# Altium PCB 按键.PcbDoc
Units mm, origin at the board's own origin, x right, y up, seen from the top; angles counter-clockwise.
Board outline 152.4 x 101.6 mm, 2 copper layers (Top Layer, Bottom Layer); 8 components, 5 nets, 18 pads, 18 vias.
Unrouted connection lines stored in the file: 4.
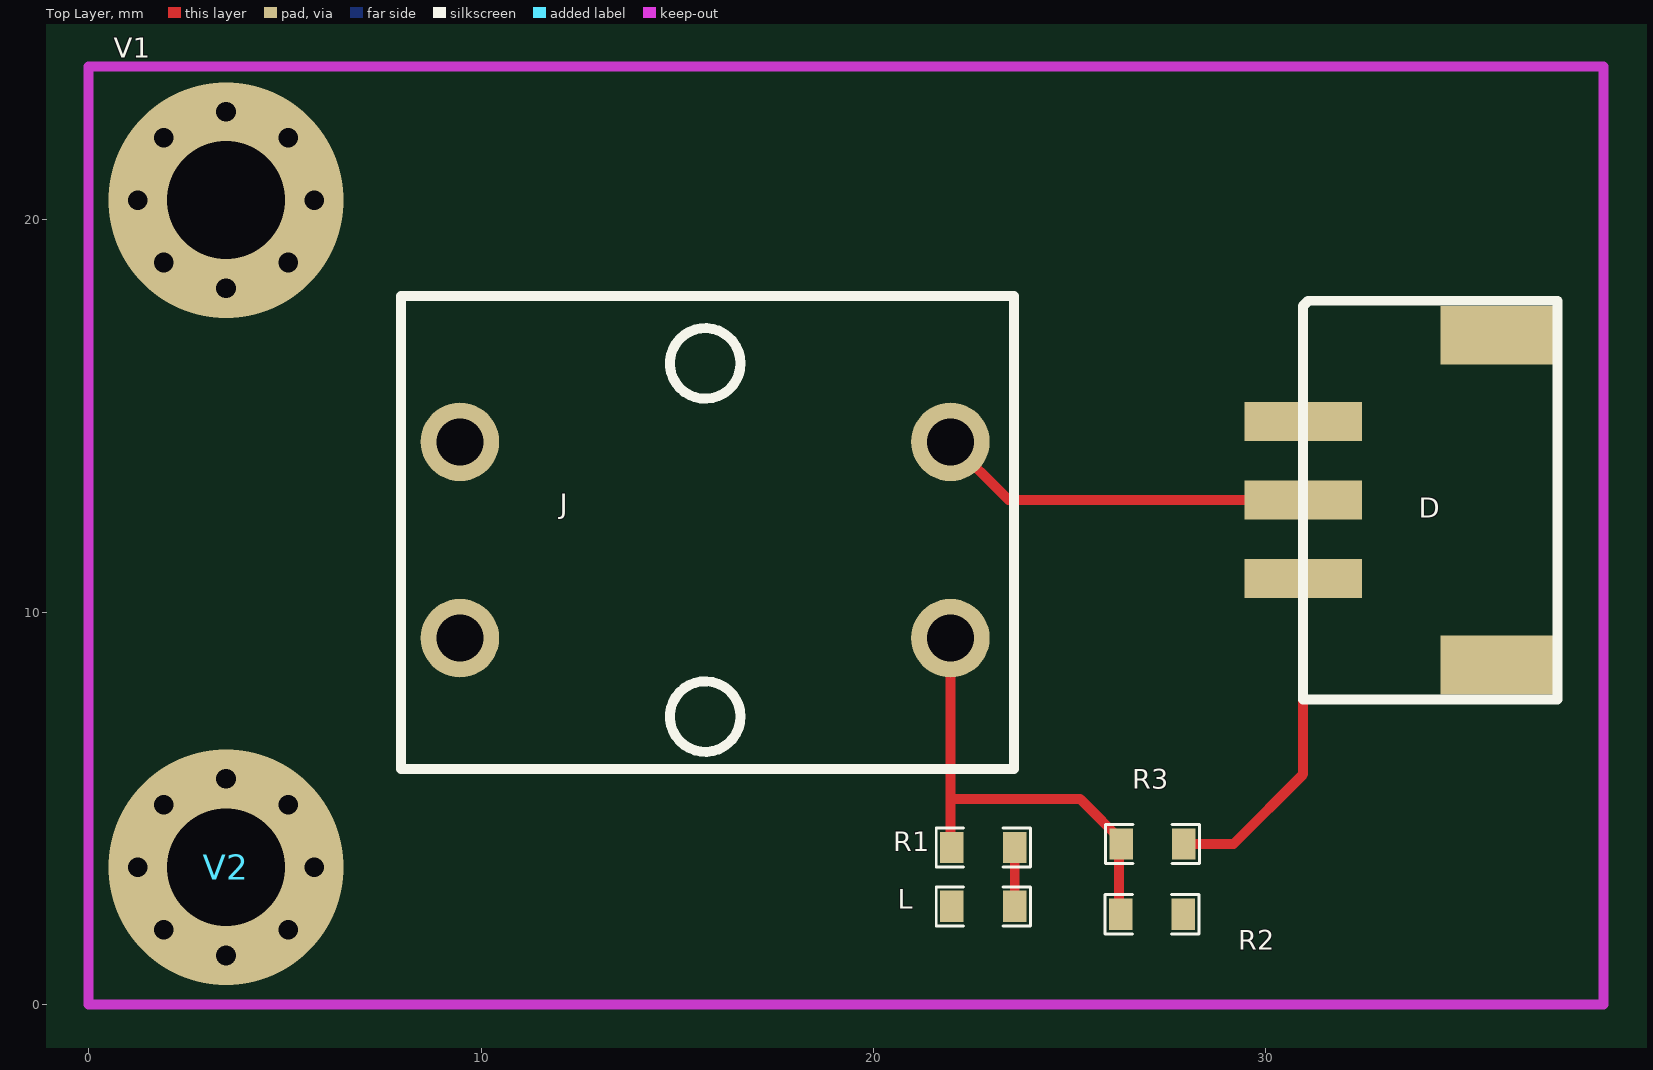
[diagram p0: Top Layer view]
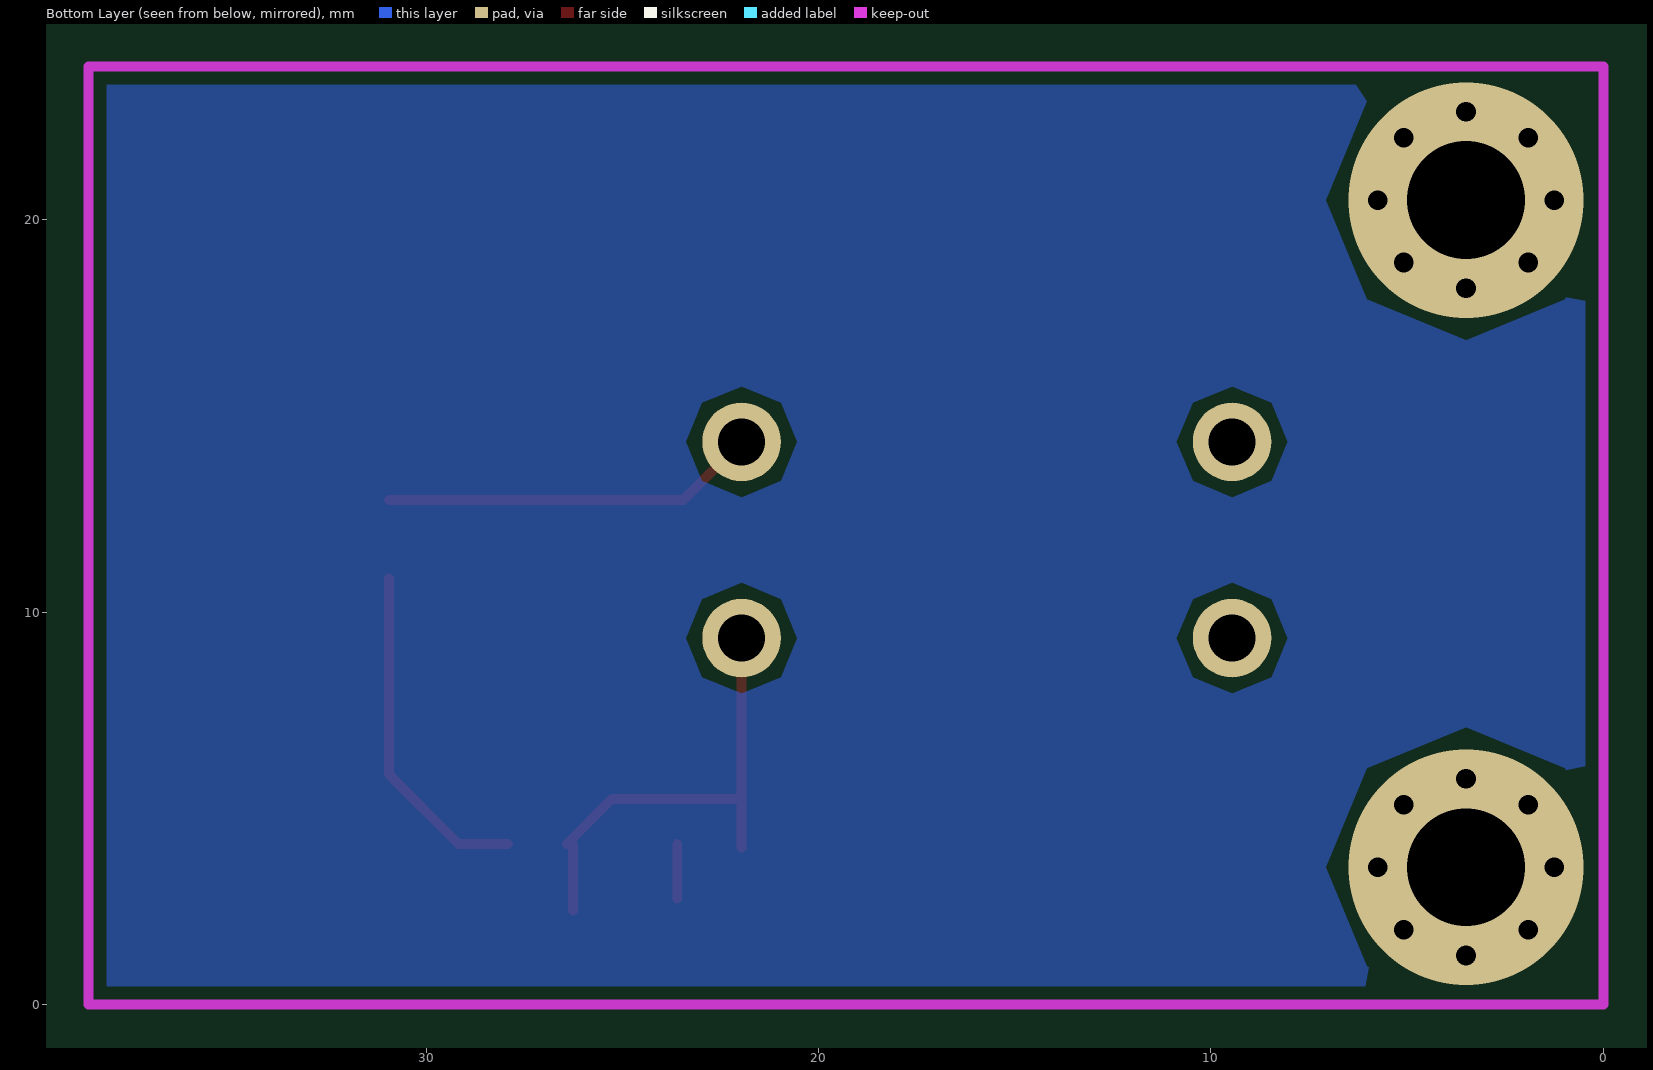
[diagram p1: Bottom Layer view, seen from below]

## Layer stack, top to bottom
Top Layer: signal copper 0.0356
Dielectric: dielectric 0.32, FR-4, Dk 4.8
Bottom Layer: signal copper 0.0356

## Board outline
-40.64,-37.592 111.76,-37.592 111.76,64.008 -40.64,64.008

## Design rules (kind name [scope] priority, off if disabled: settings)
Clearance [All] p1: gap=0.3
PolygonConnect [All] p1: connectstyle=Relief reliefconductorwidth=0.254 reliefentries=4 polygonreliefangle="90 Angle"
RoutingVias [All] p1: holewidth=0.711 width=1.27 viastyle="Through Hole" minholewidth=0.711 minwidth=1.27 maxholewidth=0.711 maxwidth=1.27
SilkscreenOverComponentPads [All] p1: minsilkscreentomaskgap=0.254
SolderMaskExpansion [All] p1: expansion=0.102
Width [All] p1: maxlimit=1 minlimit=0.2 preferedwidth=0.6
27 further rules are at their usual default settings.

## Classes and differential pairs
component class 按键: D J V1 V2

## Components (designator, comment, footprint, x,y, rotation, side; value= is the part's Value field where it differs from the comment)
D "sh-2.0" sh-2.0 30.952,12.854 r90 top
J "B3F-4055" B3F 15.712,11.838 r0 top
L "Comment" 0603E 22.1,2.5 r0 top
R1 "Comment" 0603E 22.1,4 r0 top
R2 "Comment" 0603E 26.4,2.3 r0 top
R3 "Comment" 0603E 26.411,4.091 r0 top
V1 "Via" Via 3.5,20.5 r0 top
V2 "Via" Via 3.5,3.5 r0 top

## Footprints (in the part's own frame and the unit in brackets; to place one, negate y for a bottom-side part, rotate by r counter-clockwise, add the part's x,y. Pads: shape width x height; smd on the part's side, far side on the other; paste and mask are expansions set on the pad)
0603E [mm]
  rect 0.6x0.8 smd: 1(-0.1,0) 2(1.5,0)
  silkscreen extent -0.5,-0.5 1.9,0.5
B3F [mm]
  round 2 hole 1.2: 1(-6.25,2.5) 2(6.25,2.5) 3(-6.25,-2.5) 4(6.25,-2.5)
  silkscreen extent -7.75,-5.84 7.87,6.22
sh-2.0 [mm]
  rect 1x3 smd: 1(-2,0) 2(0,0) 3(2,0) 3(2,0)
  rect 1.5x3 smd: GND(-4.2,-5) GND(4.2,-5)
  silkscreen extent -5.08,-6.48 5.08,0
Via [mm]

## Part data
D: library part s
J: library part B3F

## Via types
v1: diameter 1, hole 0.5, Top Layer to Bottom Layer, 16 vias
v2: diameter 6, hole 3, Top Layer to Bottom Layer, 2 vias

## Nets (pads, with @x,y where several pads share a name; then routed paths per layer and width w, separated by ;. In a path a pad name is that pad's centre, name@x,y a point inside that pad or via, vN(x,y) a via of type N, cw(c..) or ccw(c..) an arc to the next point about the centre after c; other vN are vias at no path point)
GND: D.3 D.GND L.1 R2.2
NetD_1: D.1 R3.2 | length 8.8
  Top Layer w0.254: R3.2 29.174,4.091 30.952,5.869 D.1
NetD_2: D.2 J.2 | length 9.6
  Top Layer w0.254: J.2 23.446,12.854 D.2
NetJ_4: J.4 R1.1 R2.1 R3.1 | length 12
  Top Layer w0.254: R1.1@21.962,4 21.962,5.234 ; J.4 21.962,5.234 ; R2.1@26.261,2.4 R3.1@26.261,4.091 ; R3.1@26.411,4.091 25.268,5.234 21.962,5.234
NetL_2: L.2 R1.2 | length 1.4
  Top Layer w0.254: L.2@23.6,2.7 R1.2@23.6,4.097
pads on no net: J.1 J.3
copper on no net:
  other v1: 3.5,1.25 1.909,1.909 5.091,1.909 1.25,3.5 5.75,3.5 1.909,5.091 5.091,5.091 3.5,5.75 3.5,18.25 1.909,18.909 5.091,18.909 1.25,20.5 5.75,20.5 1.909,22.091 5.091,22.091 3.5,22.75
  other v2: 3.5,3.5 3.5,20.5

## Polygon pours and split planes (outlines as drawn)
GND on Bottom Layer "Top Layer-No Net" (solid, pour order 3): 0,23.9 0,0.1 38.4,0.1 38.6,0.3 38.6,23.9

## Keep-outs
Keep-Out Layer:
  lines w0.254: 0,0 38.6,0 38.6,23.9 0,23.9 0,0

## Silkscreen, mask and mechanical layers (free items; w line width, h text height)
Top Solder:
  text "Digital Push Button V2" at 11.684,21.463 h1.02